# Altium PCB PCB_ReallyARobot_AD PIR Module V1.0.PcbDoc
Units mil, origin at the board's own origin, x right, y up, seen from the top; angles counter-clockwise.
Board outline 1650.02 x 938.19 mil, 2 copper layers (Top Layer, Bottom Layer); 15 components, 11 nets, 55 pads, 26 vias.
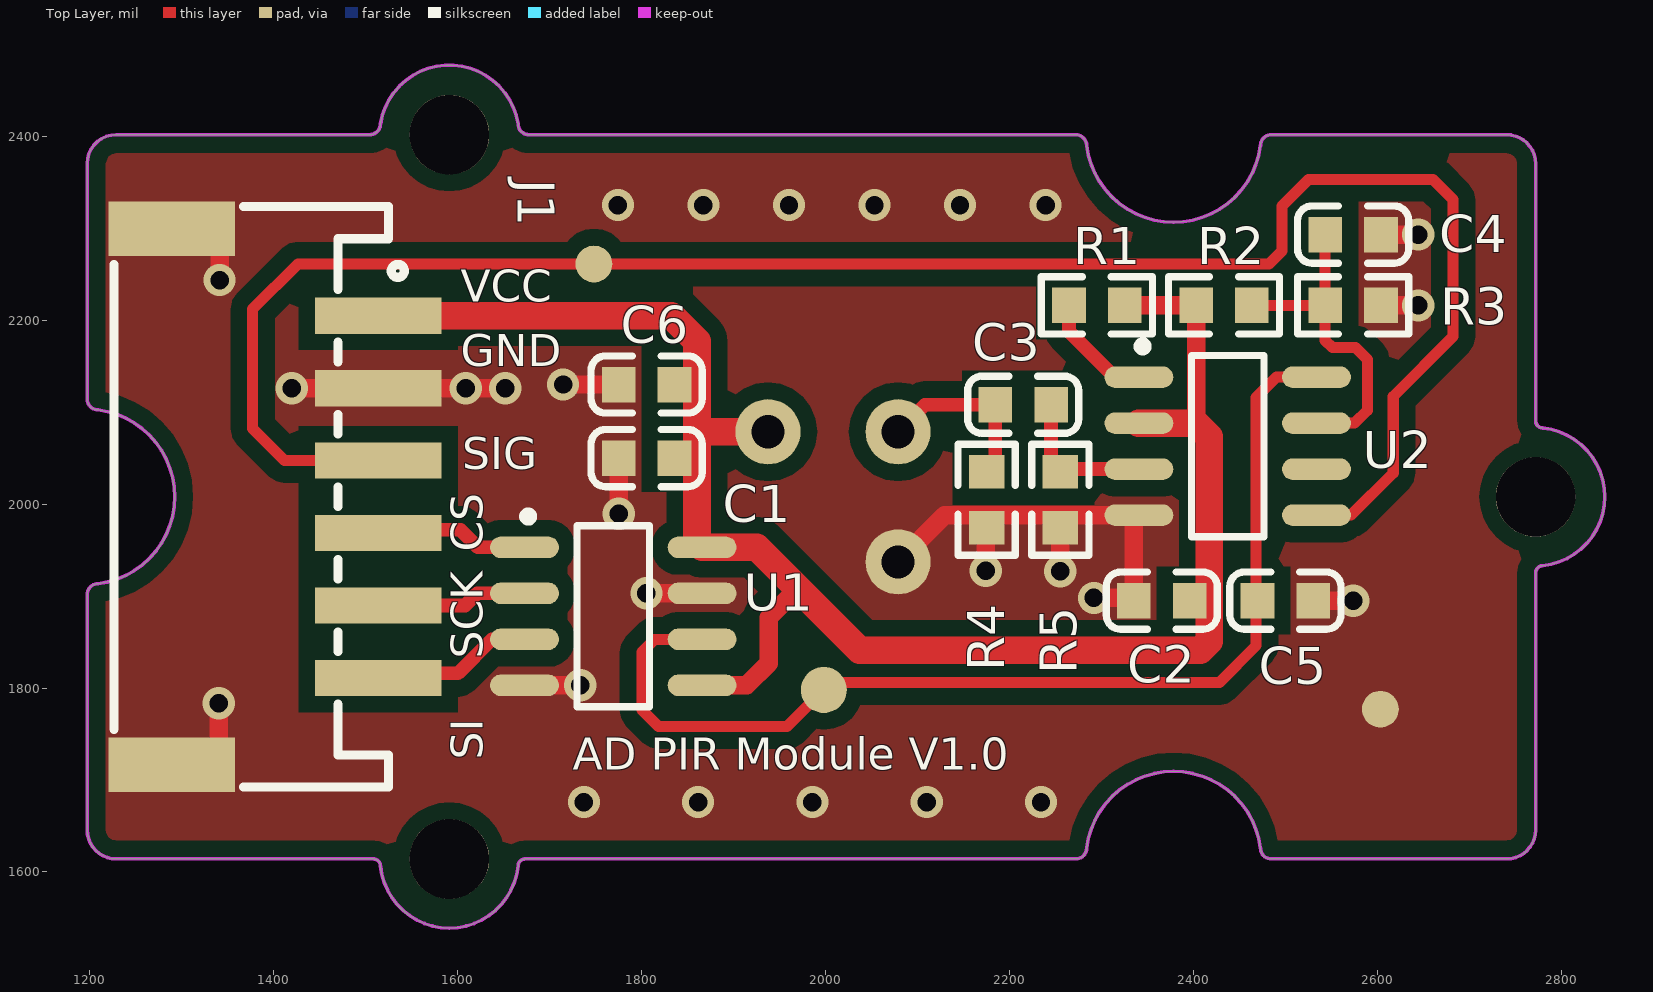
[diagram p0: Top Layer view]
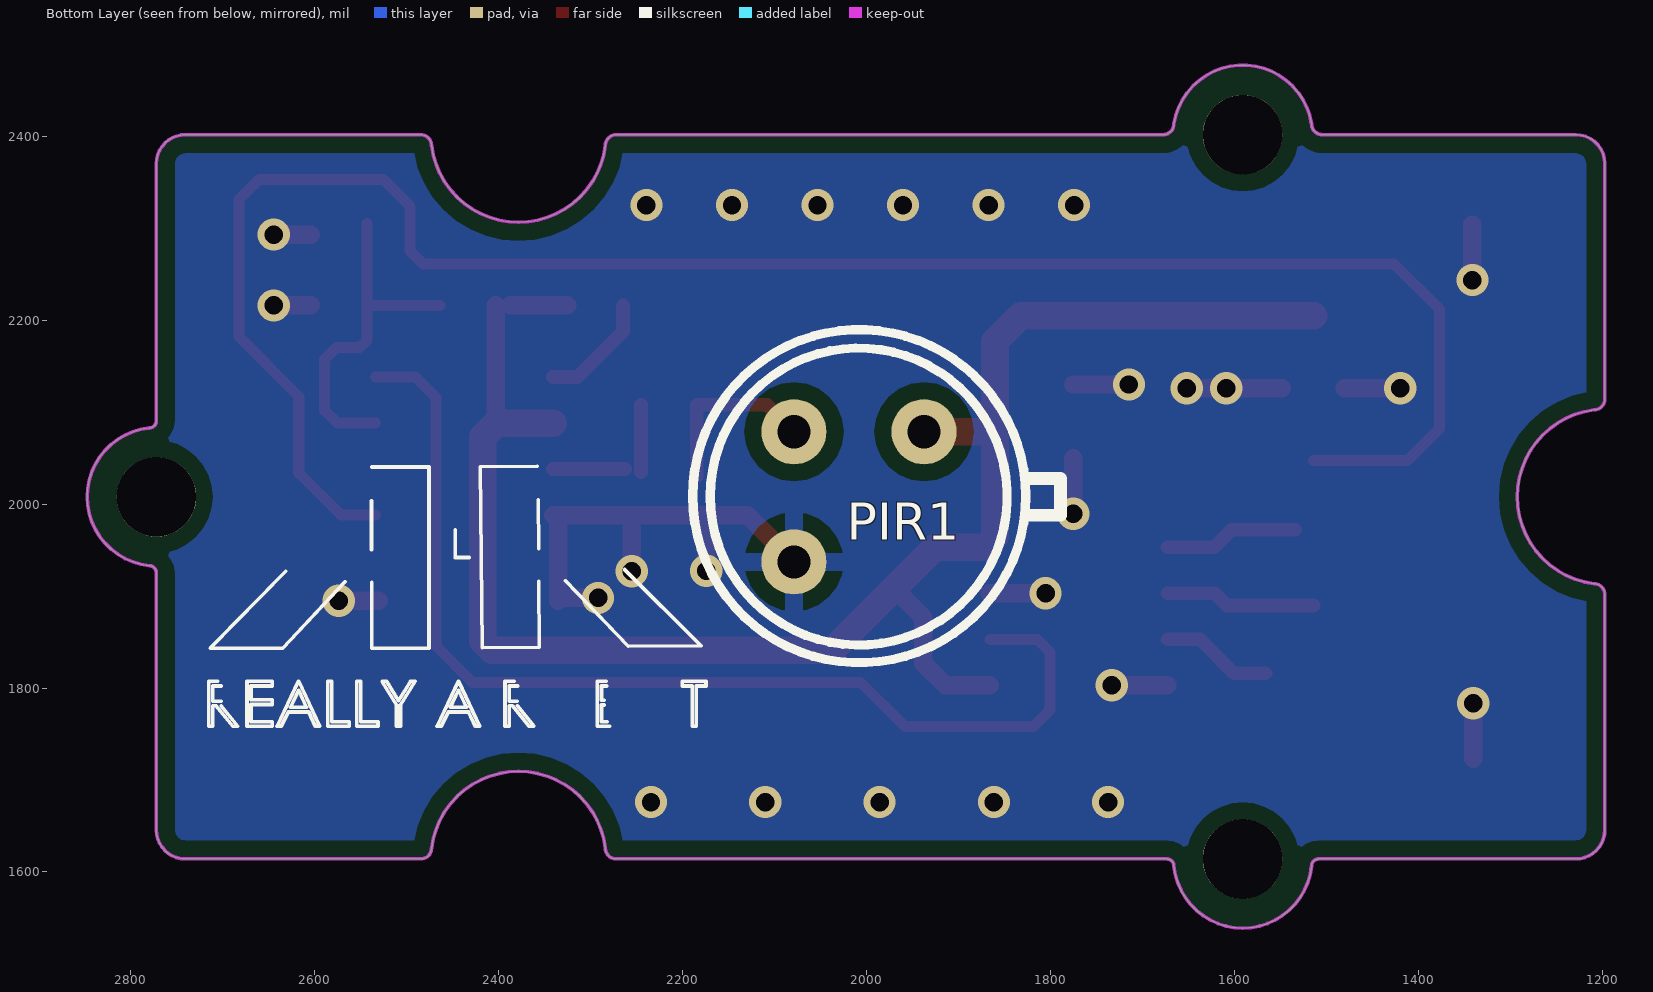
[diagram p1: Bottom Layer view, seen from below]

## Layer stack, top to bottom
Top Layer: signal copper 1.4
Dielectric: core 12.6, FR-4, Dk 4.8
Bottom Layer: signal copper 1.4

## Board outline
1197,1645.71 ccw(c1228.49,1645.7) 1228.49,1614.21 1508.02,1614.21 cw(c1508.03,1606.33) 1515.9,1606.34 ccw(c1590.7,1614.21) 1665.5,1606.34 cw(c1673.38,1606.33) 1673.38,1614.21 2271.8,1614.21 ccw(c2271.8,1626.02) 2283.61,1626.02 cw(c2378.1,1614.21) 2472.59,1626.02 ccw(c2484.4,1626.02) 2484.4,1614.21 2740.31,1614.21 ccw(c2740.31,1645.7) 2771.8,1645.71 2771.8,1925.23 cw(c2779.68,1925.23) 2779.68,1933.11 ccw(c2771.81,2007.91) 2779.68,2082.71 cw(c2779.68,2090.59) 2771.8,2090.59 2771.8,2370.11 ccw(c2740.31,2370.11) 2740.31,2401.61 2484.4,2401.61 ccw(c2484.4,2389.8) 2472.59,2389.8 cw(c2378.1,2401.61) 2283.61,2389.8 ccw(c2271.8,2389.8) 2271.8,2401.61 1677.31,2401.61 cw(c1677.31,2413.42) 1665.5,2413.42 ccw(c1590.7,2401.61) 1515.9,2413.42 cw(c1504.08,2413.42) 1504.08,2401.61 1228.49,2401.61 ccw(c1228.49,2370.11) 1197,2370.11 1197,2114.21 ccw(c1208.81,2114.21) 1208.81,2102.4 cw(c1197,2007.91) 1208.81,1913.42 ccw(c1208.81,1901.61) 1197,1901.61

## Design rules (kind name [scope] priority, off if disabled: settings)
Clearance Clearance_1 [INPOLY] p1: gap=18
Clearance [All] p2: gap=7.8
ComponentClearance [All] p1: gap=10 collisioncheckmode=3 verticalgap=10
HoleSize [All] p1: absolutevalues=TRUE maxlimit=1000 minlimit=1 maxpercent=80.000 minpercent=20.000
PolygonConnect PolygonConnect_2 [ispad vs OnLayer('Top Layer')] p1: connectstyle=Direct reliefconductorwidth=10 reliefentries=4 polygonreliefangle="90 Angle"
PolygonConnect PolygonConnect_1 [ispad vs OnLayer('Bottom Layer')] p2: connectstyle=Relief reliefconductorwidth=20 reliefentries=4 polygonreliefangle="90 Angle"
PolygonConnect [isvia] p3: connectstyle=Direct reliefconductorwidth=10 reliefentries=4 polygonreliefangle="90 Angle"
RoutingVias [All] p1: holewidth=28 width=50 viastyle="Through Hole" minholewidth=28 minwidth=50 maxholewidth=28 maxwidth=50
SolderMaskExpansion [All] p1: expansion=4
TestPointUsage [All] p1: valid=0 allowmultiple=FALSE
Testpoint [All] p1: side=3 testpointundercomponent=TRUE minsize=40 maxsize=100 preferedsize=60 minholesize=0 maxholesize=40 preferedholesize=32 testpointgrid=1 style=297 order=0-112345678
Width [All] p1: maxlimit=1000 minlimit=8 preferedwidth=11.81
17 further rules are at their usual default settings.

## Components (designator, comment, footprint, x,y, rotation, side; value= is the part's Value field where it differs from the comment)
C1 "100nF" 0603C 1775,2050 r0 top
C2 "100nF" 0603C 2335,1895 r0 top
C3 "470nF" 0603C 2245,2108 r180 top
C4 "100nF" 0603C 2603.63,2293 r180 top
C5 "100nF" 0603C 2530,1895 r180 top
C6 "10uF" 0603C 1775,2130 r0 top
J1 "ZX-PH2.0-WT6P" CONN-SMD_6P-P2.00_ZX-PH2.0-WT6P 1401.3,2007.91 r270 top locked
PIR1 "LHI 968" PIR 2007.91,2007.91 r270 bottom locked
R1 "10K" 0603R 2325,2216.02 r180 top
R2 "1M" 0603R 2402.68,2216.02 r0 top
R3 "18K" 0603R 2543,2216.02 r0 top
R4 "100K" 0603R 2175,2035 r270 top
R5 "2M2" 0603R 2255,2035 r270 top
U1 "MCP41010T-I/SN" SO-8 1700,1930 r0 top
U2 "HS6601MX" SO-8 2368,2115 r0 top

## Footprints (in the part's own frame and the unit in brackets; to place one, negate y for a bottom-side part, rotate by r counter-clockwise, add the part's x,y. Pads: shape width x height; smd on the part's side, far side on the other; paste and mask are expansions set on the pad)
0603C [mm]
  rect 0.93x0.98 smd: 1(0,0) 2(1.54,0)
  silkscreen extent -0.76,-0.79 2.31,0.79
0603R [mm]
  rect 0.93x0.98 smd: 1(0,0) 2(1.54,0)
  silkscreen extent -0.76,-0.79 2.31,0.79
CONN-SMD_6P-P2.00_ZX-PH2.0-WT6P [mm]
  rect 1x3.5 smd: 1(-5,2.85) 2(-3,2.85) 3(-1,2.85) 4(1,2.85) 5(3,2.85) 6(5,2.85)
  rect 1.5x3.5 smd: 7(7.4,-2.85) 8(-7.4,-2.85)
  silkscreen extent -8.02,-4.45 8.02,3.57
PIR [mm] "红外热释探头629E"
  round 1.8 hole 0.914: D(-1.796,1.796) G(1.796,-1.796) S(-1.796,-1.796)
  silkscreen extent -4.61,-4.59 4.58,5.56
SO-8 [mm]
  oval 1.9x0.6 smd: 1(-0.699,0.584) 2(-0.699,-0.686) 3(-0.699,-1.956) 4(-0.699,-3.226) 5(4.204,-3.226) 6(4.204,-1.956) 7(4.204,-0.686) 8(4.204,0.584)
  silkscreen extent -0.72,-3.82 2.75,1.56

## Part data
C1 C2 C3 C4 C5 C6: library part Cap, "Capacitor"
PIR1: library part RIP
R1 R2 R3 R4 R5: library part Res1, "Resistor"

## Free pads (board coordinates)
  round 40 smd: 0(1748,2261) 0(2603,1777)
  round 50 smd: 0(1997.91,1797.91)
  round 86.61 hole 86.61 unplated: MH1(1590.7,1614.21) MH2(1590.7,2401.61) MH3(2771.8,2007.91)

## Via types
v1: diameter 35, hole 20, Top Layer to Bottom Layer, tented both sides, 26 vias

## Nets (pads, with @x,y where several pads share a name; then routed paths per layer and width w, separated by ;. In a path a pad name is that pad's centre, name@x,y a point inside that pad or via, vN(x,y) a via of type N, cw(c..) or ccw(c..) an arc to the next point about the centre after c; other vN are vias at no path point)
CS: J1.4 U1.1 | length 146.4
  Top Layer w15: J1.4@1534,1972 1603,1972 1622,1953 U1.1
GND: C1.1 C2.1 C4.1 C5.1 C6.1 J1.2 J1.7 J1.8 pad.0@2603,1777 PIR1.G R3.2 R4.2 R5.2 U1.4 U1.7 U2.4 | length 1173.5
  Top Layer w20: J1.7@1340,1723 v1(1340,1783.52) ; v1(1341,2243.48) J1.8@1341,2304 ; v1(1419.48,2126) J1.2@1480,2126 ; J1.2@1548,2126 v1(1651.52,2126) ; U1.4 v1(1733,1803) ; v1(1714.48,2130) C6.1 ; v1(1775,1989.48) C1.1 ; v1(1805,1903) U1.7 ; PIR1.G 2129.42,1988 U2.4 ; v1(2174,1927.48) R4.2@2174,1988 ; v1(2255,1927) R5.2 ; v1(2291.48,1898) C2.1@2335,1898 ; C2.1 U2.4@2335,1982.52 ; C5.1 v1(2573.52,1895) ; R3.2 v1(2644.15,2216.02) ; C4.1 v1(2644.15,2293)
  other v1: 1737,1676 1861.25,1676 1985.5,1676 2109.75,1676 2234,1676 1608.52,2126 1774,2325 1867,2325 1960,2325 2053,2325 2146,2325 2239,2325
MOSI: J1.6 U1.3 | length 121.8
  Top Layer w15: J1.6@1566,1816 1600,1816 1637,1853 U1.3
NetR1_2: R1.2 U2.1 | length 125.1
  Top Layer w15: R1.2 2264.37,2187.63 2314,2138 U2.1
PIRIN: C3.1 R5.1 U2.3 | length 151.5
  Top Layer w15: R5.1@2245,2035 C3.1 ; R5.1@2262,2038 U2.3
S: C3.2 PIR1.S R4.1 | length 196.3
  Top Layer w15: PIR1.S 2108,2108 C3.2 R4.1@2184.37,2029.63
SCK: J1.5 U1.2 | length 164.4
  Top Layer w15: J1.5 1607.8,1889.8 1621,1903 U1.2
SENSE: C5.2 pad.0@1997.91,1797.91 U1.6 U2.8 | length 1190.9
  Top Layer w12: U1.6 1814,1853 1800,1839 1800,1776 1818,1758 1958,1758 2006,1806 2428,1806 2468,1846 2468,2116 2490,2138 U2.8
SIG: J1.3 pad.0@1748,2261 U2.5 | length 2108.6
  Top Layer w12: J1.3 1411.72,2047.28 1377,2082 1377,2212 1426,2261 2482,2261 2496,2275 2496,2324 2525,2353 2660,2353 2682,2331 2682,2182 2617,2117 2617,2034 2571,1988 U2.5
TIME: C4.2 R2.2 R3.1 U2.7 | length 377.7
  Top Layer w12: R2.2 R3.1 ; U2.7 2575,2088 2589,2102 2589,2157 2576,2170 2551,2170 2543,2178 C4.2@2543,2305
VCC: C1.2 C2.2 C6.2 J1.1 PIR1.D R1.1 R2.1 U1.5 U1.8 U2.2 | length 1917.3
  Top Layer w20: U1.5 1914,1803 1938,1827 1938,1876.61 1969.53,1908.14 ; R1.1 R2.1@2387.02,2216.02 ; 2402.68,2088.68 R2.1
  Top Layer w30: J1.1 1832.24,2204.76 1860,2177 1860,1965 ; 1862.62,2078.62 PIR1.D ; U1.8 1925,1953 2037,1841 2407,1841 2417,1851 2417,2073 2402,2088 U2.2
pads on no net: U2.6

## Polygon pours and split planes (outlines as drawn)
GND on Top Layer "PWR-No Net" (solid, remove dead copper, pour order 1000): 1228.49,2401.61 1235.1,2395 2767,2395 2767,1624 2762,1619 1198,1619 1198,2373 1213,2388
GND on Bottom Layer "PWR-No Net" (solid, remove dead copper, pour order 1001): 1228.49,2401.61 2740.3,2401.61 2771.8,2370.11 2771.8,1632.8 2757,1618 1212,1618 1200,1630 1200,2392 1196,2396

## Keep-outs
Keep-Out Layer:
  the board outline again, w3.94

## Silkscreen, mask and mechanical layers (free items; w line width, h text height)
Top Overlay:
  text "VCC" at 1603,2220 h35
  text "GND" at 1603,2150 h35
  text "SIG" at 1605,2038 h35
  text "CS" at 1627,1948 h35 r90
  text "SCK" at 1627,1832 h35 r90
  text "SI" at 1627,1722 h35 r90
  text "AD PIR Module V1.0" at 1725,1700 h60
Bottom Overlay:
  circle w1.97: c2447,1941.88 r0.98
  lines w3.94: 2262.73,1928.86 2179.7,1846.1 2258.73,1845.32 2327.02,1916.81 ; 2279.04,1758.28 2292.28,1758.28 2292.28,1807.24 2282.73,1807.24 ; 2281.63,1763.3 2287.89,1763.3 2287.89,1781.5 2284.97,1781.5 ; 2281.92,1802.22 2287.89,1802.22 2287.89,1786.52 2284.93,1786.52 ; 2356.24,1916.06 2355.53,1844.36 2417.64,1843.74 2419.6,2040.58 2357.49,2041.2 ; 2356.21,1951.36 2356.74,2004.46 ; 2379.13,1802.22 2388.31,1802.22 2388.31,1785.9 2379.35,1785.83 ; 2379.31,1780.87 2361.32,1758.28 2366.76,1758.28 2384.74,1780.87 2388.31,1780.87 2388.31,1758.28 2392.71,1758.28 2392.71,1807.24 2382.91,1807.24 ; 2431.94,1941.88 2447,1941.88 2447,1972 ; 2537.5,1915.16 2537.5,1843.45 2475.38,1843.45 2475.38,2040.3 2537.5,2040.3 ; 2537.88,1950.46 2537.88,2003.56 ; 2566.73,1915.61 2634.3,1843.45 2713.34,1843.45 2631.13,1927.03 ; 2701.13,1802.22 2710.31,1802.22 2710.31,1785.9 2701.34,1785.83 ; 2701.3,1780.87 2683.32,1758.28 2688.75,1758.28 2706.74,1780.87 2710.31,1780.87 2710.31,1758.28 2714.7,1758.28 2714.7,1807.24 2704.9,1807.24 ; 2174.28,1802.22 2184.95,1802.22 2184.95,1758.28 2189.34,1758.28 2189.34,1802.22 2200.01,1802.22 2200.01,1807.24 2174.28,1807.24 2174.28,1802.22 ; 2420.32,1758.28 2442.92,1807.24 2443.55,1807.24 2466.77,1758.28 2461.98,1758.28 2454.53,1773.97 2432.34,1773.97 2425.1,1758.28 2420.32,1758.28 ; 2434.65,1778.99 2452.15,1778.99 2443.28,1797.69 2434.65,1778.99 ; 2490.62,1807.24 2495.65,1807.24 2508.5,1786.2 2521.37,1807.24 2526.4,1807.24 2510.71,1781.55 2510.71,1758.28 2506.31,1758.28 2506.31,1781.55 2490.62,1807.24 ; 2530.79,1758.28 2530.79,1763.3 2549.62,1763.3 2549.62,1807.24 2554.02,1807.24 2554.02,1758.28 2530.79,1758.28 ; 2562.18,1758.28 2562.18,1763.3 2581.01,1763.3 2581.01,1807.24 2585.4,1807.24 2585.4,1758.28 2562.18,1758.28 ; 2594.19,1758.28 2616.78,1807.24 2617.41,1807.24 2640.64,1758.28 2635.84,1758.28 2628.4,1773.97 2606.2,1773.97 2598.96,1758.28 2594.19,1758.28 ; 2608.52,1778.99 2626.01,1778.99 2617.15,1797.69 2608.52,1778.99 ; 2645.66,1758.28 2645.66,1763.3 2668.88,1763.3 2668.88,1782.13 2645.66,1782.13 2645.66,1787.15 2668.88,1787.15 2668.88,1802.22 2645.66,1802.22 2645.66,1807.24 2673.27,1807.24 2673.27,1758.28 2645.66,1758.28